# EAGLE board ai_ft232rl_breakout (EAGLE 6.4)
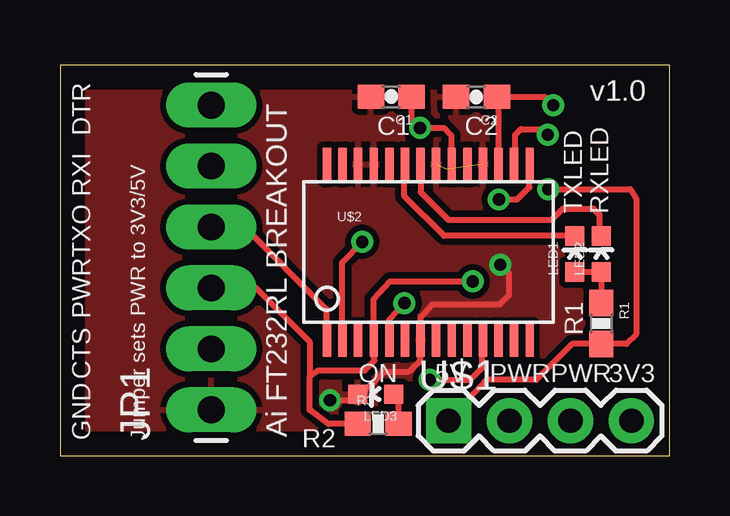
[diagram p0: board, top side]
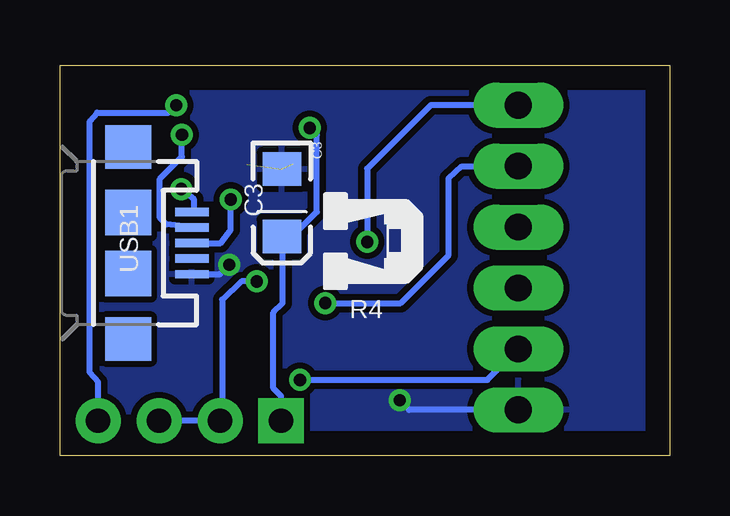
[diagram p1: board, bottom side, seen from below]

Size 25.4 x 16.26 mm. Coordinates in mm from the lower left corner, seen from the top.
Outline: 0,0 25.4,0 25.4,16.26 0,16.26 0,0
Copper layers (1*16): Top 0.035mm / dielectric 1.5mm / Bottom 0.035mm
Design rules "default *": minimum track width 10mil, minimum drill 20mil, track to track 8mil, track to pad 8mil, pad to pad 8mil, via to via 8mil, smd to smd 8mil, copper to edge 40mil, drill to drill 8mil, minimum pad ring 10mil, minimum via ring 8mil, stop-mask expansion 4mil, vias tented up to drill 0mil, thermal gap 10mil
Net classes: 0 default: width 0.203 mm; 1 power: width 0.254 mm

## Footprints (pad centres in the part's own frame; a part is rotated, then mirrored left to right if it is on the bottom)
0603-CAP = smd 1.1 x 1: 1 -0.85,0; 2 0.85,0
EIA3216 = smd 1.4 x 1.6: A 1.4,0; C -1.4,0
1X06-LONG = drill 1.118 pad 1.88 long: 1 -6.35,0; 2 -3.81,0; 3 -1.27,0; 4 1.27,0; 5 3.81,0; 6 6.35,0
LED-0603 = smd 0.8 x 0.8: A 0,-0.75; C 0,0.75
0603-RES = smd 1.1 x 1: 1 -0.85,0; 2 0.85,0
1X04 = drill 1.016 pad 1.88 square: 1 -3.81,0 | drill 1.016 pad 1.88: 2 -1.27,0; 3 1.27,0; 4 3.81,0
SSOP28-LD = smd 0.348 x 1.397: 1 -4.225,-3.656; 2 -3.575,-3.656; 3 -2.925,-3.656; 4 -2.275,-3.656; 5 -1.625,-3.656; 6 -0.975,-3.656; 7 -0.325,-3.656; 8 0.325,-3.656; 9 0.975,-3.656; 10 1.625,-3.656; 11 2.275,-3.656; 12 2.925,-3.656; 13 3.575,-3.656; 14 4.225,-3.656; 15 4.225,3.656; 16 3.575,3.656; 17 2.925,3.656; 18 2.275,3.656; 19 1.625,3.656; 20 0.975,3.656; 21 0.325,3.656; 22 -0.325,3.656; 23 -0.975,3.656; 24 -1.625,3.656; 25 -2.275,3.656; 26 -2.925,3.656; 27 -3.575,3.656; 28 -4.225,3.656
USB-MICROB = smd 0.35 x 1.4: D+ 0,2.65; D- -0.65,2.65; GND 1.3,2.65; ID 0.65,2.65; VBUS -1.3,2.65 | smd 1.8 x 1.9: MT1 -4,0; MT2 4,0 | smd 1.9 x 1.9: P$1 -1.27,0; P$2 1.27,0

## Placement (x,y rotation side)
C1  0.1uF  [0603-CAP]  13.8,14.95 180 top
C2  0.1uF  [0603-CAP]  17.35,14.94 180 top
C3  10uF  [EIA3216]  16.16,10.53 270 bottom
JP1  M06X1  [1X06-LONG]  6.3,8.25 90 top
LED1  YELLOW  [LED-0603]  21.45,8.4 0 top
LED2  YELLOW  [LED-0603]  22.55,8.4 0 top
LED3  BLUE  [LED-0603]  13.15,2.55 90 top
R1  [0603-RES]  22.55,5.5 270 top
R3  125  [0603-RES]  13.26,1.32 0 top
U$1  M04X1  [1X04]  20,1.45 0 top
U$2  FT2332RL  [SSOP28-LD]  15.35,8.48 0 top
USB1  USB-MICROB  [USB-MICROB]  22.56,8.85 270 bottom

## Library data of the parts
C1-C3 R1 R3 = Ai_Passives
JP1 U$1 USB1 = Ai_Connectors
LED1-LED3 = Ai_LED
U$2 = Ai_IC

## Nets
3V3: C2.1 U$1.4 U$2.17
5V: C1.1 C3.A R1.2 U$1.1 U$2.20 USB1.VBUS
CTS: JP1.2 U$2.11
DTR: JP1.6 U$2.2
GND [power]: C1.2 C2.2 C3.C JP1.1 LED3.C U$2.7 U$2.18 U$2.21 U$2.25 U$2.26 USB1.GND
N$1: LED1.C U$2.23
N$2: LED2.C U$2.22
N$3: U$2.16 USB1.D-
N$4: U$2.15 USB1.D+
N$6: LED1.A LED2.A R1.1
N$9: LED3.A R3.2
PWR: JP1.3 R3.1 U$1.2 U$1.3 U$2.4
RXI: JP1.5 U$2.5
TXO: JP1.4 U$2.1

## Tracks (layer width: path | path; a pad name or v marks a point on that pad's centre or on a via)
3V3  (via drill 0.51 pad 0.25)
  Top 0.254: U$2.17 18.27,14.57 C2.1 20.21,14.94 v20.55,14.6
  Bottom 0.254: U$1.4 23.81,3.06 24.15,3.45 24.15,13.94 23.85,14.29 20.86,14.29 v20.55,14.6
5V  (via drill 0.51 pad 0.25)
  Top 0.254: U$1.1 17.79,3.15 19.85,3.15 21.35,4.65 R1.2 23.6,4.65 24,5.05 24,10.7 23.75,11.1 v20.35,11.1 | U$2.20 16.3,12.16 16.3,13.35 16,13.65 v15,13.65 14.95,13.65 14.65,13.95 C1.1
  Bottom 0.254: v15,13.65 14.7,13.35 14.7,10.15 15.72,9.13 C3.A 16.13,9.1 16.13,6.35 16.51,5.97 16.51,2.79 16.19,2.47 U$1.1 | USB1.VBUS 19.81,10.29 19.81,10.67 v20.35,11.1
CTS  (via drill 0.51 pad 0.25)
  Top 0.254: 17.6,4.8 U$2.11 17.6,4.8 17.6,3.65 17.1,3.15 v15.4,3.15
  Bottom 0.254: v15.4,3.15 7.59,3.15 JP1.2
DTR  (via drill 0.51 pad 0.25)
  Top 0.254: U$2.2 11.75,4.84 11.75,8.05 v12.6,8.9
  Bottom 0.254: JP1.6 9.95,14.6 12.6,11.95 v12.6,8.9
GND  (via drill 0.51, 0.51 pad 0.25)  (2 unrouted)
  Top 0.254: v11.25,2.3 12.15,2.3 LED3.C 12.55,2.55 13.5,3.5 14.55,3.5 15,3.95 15,4.8 U$2.7 15.02,5.77 15.5,6.3 18.33,6.3 18.71,6.68 18.71,7.59 v18.35,7.95
  Bottom 0.254: 6.36,1.9 10.85,1.9 v11.25,2.3 | USB1.GND 18.75,7.55 v18.35,7.95
  pour Bottom (isolate 0.254): 0,0 25.4,0 25.4,16.26 0,16.26
  pour Top (isolate 0.254): 0,0 25.4,0 25.4,16.26 0,16.26
N$1
  Top 0.254: LED1.C 16,9.15 14.35,10.8 14.35,12.11 U$2.23
N$2
  Top 0.254: U$2.22 15.02,10.98 16.18,9.82 20.49,9.82 20.95,10.29 22.23,10.29 22.48,10.03 22.48,9.22 LED2.C
N$3  (via drill 0.51 pad 0.25)  (1 unrouted)
  Top 0.254: U$2.16 18.95,12.16 18.95,13.35 19.2,13.6 20.08,13.6 v20.32,13.36
  Bottom 0.254: USB1.D- 20.95,9.63 21.23,9.91 21.23,11.53 20.32,12.45 | 20.32,12.46 v20.32,13.36
N$4  (via drill 0.51 pad 0.25)
  Top 0.254: 19.55,12.11 U$2.15 19.56,12.12 19.56,11.18 19.05,10.67 v18.29,10.67
  Bottom 0.254: USB1.D+ 18.71,8.85 18.29,9.4 v18.29,10.67
N$6
  Top 0.254: R1.1 LED2.A LED1.A
N$9
  Top 0.254: R3.2 14.11,2.35 LED3.A
PWR  (via drill 0.51 pad 0.25)
  Top 0.254: R3.1 11.18,1.32 10.4,1.9 10.4,3.3 | 10.4,3.3 10.75,3.55 12.7,3.55 13.1,3.95 13.1,4.79 U$2.4 13.07,6.53 13.75,7.25 v17.2,7.25 | JP1.3 8.16,6.99 10.4,4.75 10.4,3.3
  Bottom 0.254: U$1.3 U$1.2 18.65,1.51 18.65,6.5 17.85,7.25 v17.2,7.25
RXI  (via drill 0.51 pad 0.25)
  Top 0.254: U$2.5 13.72,5.67 v14.35,6.35
  Bottom 0.254: v14.35,6.35 11.2,6.35 9.21,8.35 9.21,11.55 8.65,12.05 6.37,12.05 JP1.5
TXO
  Top 0.254: JP1.4 7.67,9.53 11.1,6.1 11.1,4.84 U$2.1

## Text on the board
tPlace: v1.0 | DTR | C1 | C2 | RXI | TXLED | RXLED | TXO | PWR | R1 | CTS | ON | 5V | PWR | PWR | 3V3 | GND | Jumper sets PWR to 3V3/5V | Ai FT232RL BREAKOUT | R2
bPlace: C3 | /home/xisco/ai_logo.bmp | R4
_tsilk: Ai FT232RL BREAKOUT | v1.0 | DTR | RXI | R1 | TXLED | TXO | RXLED | R2 | PWR | R3 | CTS | 3V3 | PWR | PWR | 5V | GND | Jumper sets PWR to 3V3/5V | 5V | 3V3
_bsilk: C1 | C2 | /home/xisco/ai_logo.bmp | R4